# Altium PCB Pcb Layout with lora.PcbDoc
Units mm, origin at the board's own origin, x right, y up, seen from the top; angles counter-clockwise.
Board outline 47.4 x 68.9 mm, 2 copper layers (Top Layer, Bottom Layer); 15 components, 18 nets, 89 pads, 0 vias.
Unrouted connection lines stored in the file: 3.
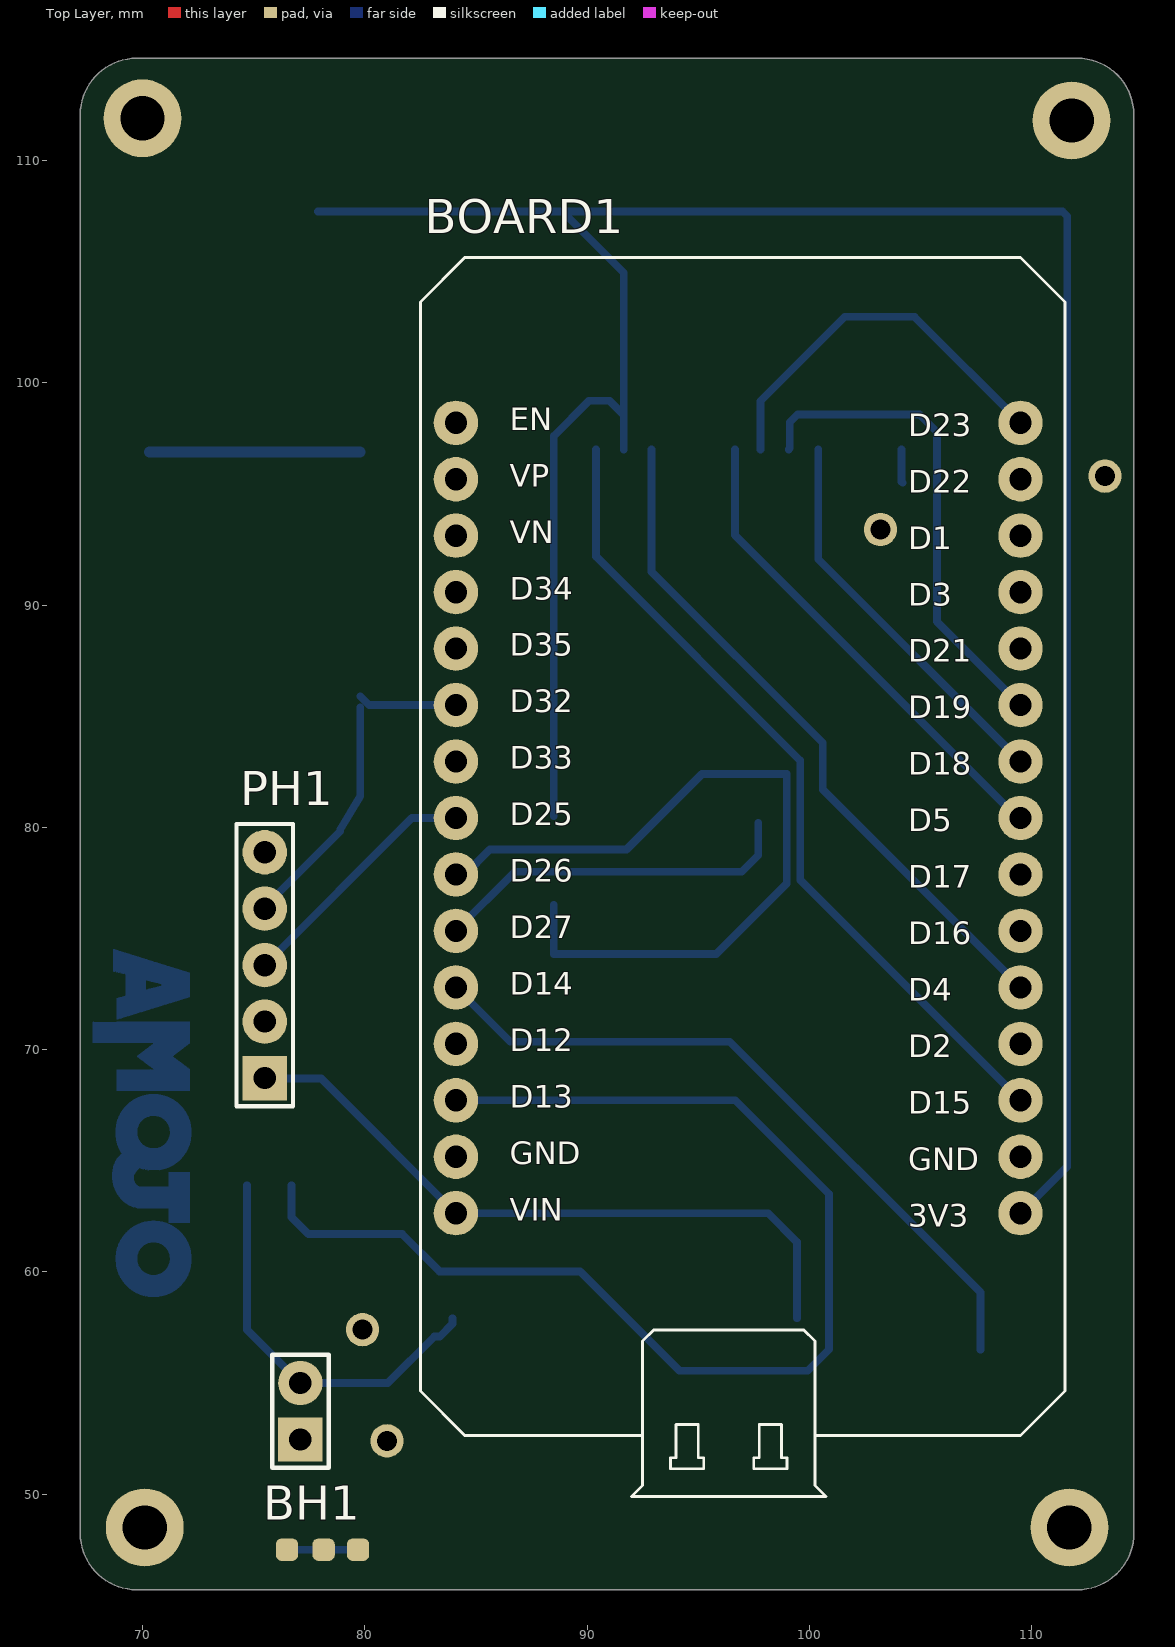
[diagram p0: Top Layer view]
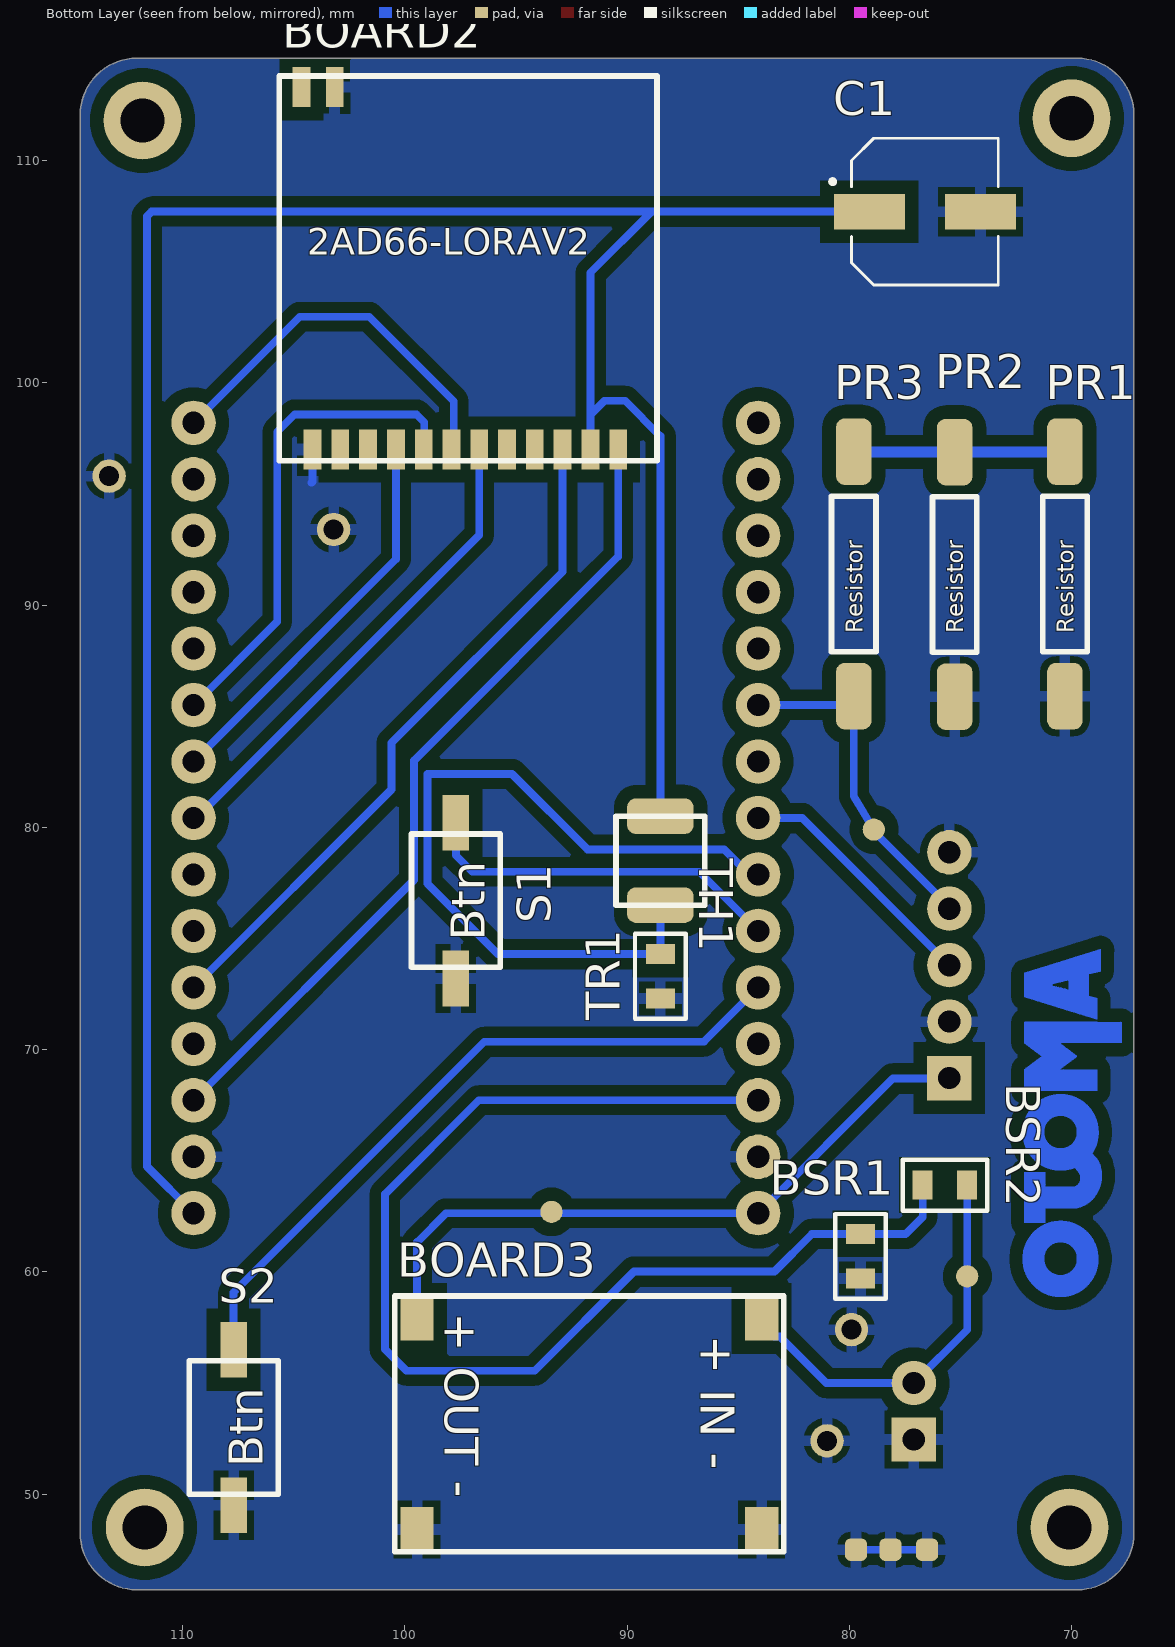
[diagram p1: Bottom Layer view, seen from below]

## Layer stack, top to bottom
Top Solder: solder mask 0.0102, Solder Resist, Dk 3.5
Top Layer: signal copper 0.0356
Dielectric 1: dielectric 0.32, FR-4, Dk 4.8
Bottom Layer: signal copper 0.0356
Bottom Solder: solder mask 0.0102, Solder Resist, Dk 3.5

## Board outline
112.06,114.6 cw(c112.06,112.06) 114.6,112.06 114.6,48.244 cw(c112.06,48.24) 112.06,45.7 69.74,45.7 cw(c69.74,48.24) 67.2,48.24 67.2,112.06 cw(c69.74,112.06) 69.74,114.6

## Design rules (kind name [scope] priority, off if disabled: settings)
Clearance [All] p1: gap=0.6 ignorepadtopadclearanceinfootprint=FALSE except(0: Arc-Hole Track-Hole SMDPad-Hole THPad-Hole Via-Hole Fill-Hole Poly-Hole Region-Hole Text-Hole; 0.254: Arc-Arc Arc-Track Track-Track SMDPad-SMDPad THPad-THPad THPad-Text; 0.3: Arc-Text Track-Text SMDPad-Text Via-Text Fill-Text Poly-Text Region-Text Text-Text; 0.4: Arc-Via Track-Via SMDPad-Via THPad-Via Via-Via; 0.5: Arc-SMDPad Arc-THPad Arc-Fill Arc-Poly Arc-Region Track-SMDPad Track-THPad Track-Fill Track-Poly Track-Region SMDPad-THPad)
PlaneClearance [All] p1: clearance=1.2
PlaneConnect [All] p1: planeconnectstyle=Relief reliefexpansion=0.508 reliefentries=4 reliefconductorwidth=0.5 reliefairgap=0.254
PolygonConnect [All] p1: connectstyle=Relief reliefconductorwidth=0.5 reliefentries=4 polygonreliefangle="90 Angle" airgapwidth=0.3
RoutingLayers [All] p1: top layer_v5=FALSE bottom layer_v5=TRUE
RoutingVias [All] p1: holewidth=0.711 width=1.27 viastyle="Through Hole" minholewidth=0.711 minwidth=1.27 maxholewidth=0.711 maxwidth=1.27
SolderMaskExpansion [All] p1: expansion=0.102 istentingtop=FALSE
Width [All] p1: maxlimit=0.5 minlimit=0.2 preferedwidth=0.35
27 further rules are at their usual default settings.

## Components (designator, comment, footprint, x,y, rotation, side; value= is the part's Value field where it differs from the comment)
BH1 "" HDR1X2 77.1,52.46 r90 top
BOARD1 "ESP32DEVKITV1" ESP32-DEVKITV1 109.5,62.64 r90 top locked
BOARD2 "Lora 2AD66-LORAV2" "LORA 2AD66-LORAV2" 104.15,97 r180 bottom
BOARD3 "Step Down Buck DC DC 3A" "STEP DOWN BUCK DC DC 3A" 99.447,57.912 r270 bottom
BSR1 "Resistor_1" "SMD RESISTOR" 79.5,60.7 r90 bottom value=30k
BSR2 "" "SMD RESISTOR" 75.7,63.9 r180 bottom value=100k
C1 "Capacitor" CAP_EEEFK1C470AL 76.6,107.7 r180 bottom value=1p
PH1 "Panel+Servo" HDR1X5 75.5,68.72 r90 top
PR1 "" "1/4W SMD RESISTOR" 70.3,85.4 r90 bottom value=10
PR2 "" "1/4W SMD RESISTOR" 75.26,85.379 r90 bottom value=10
PR3 "" "1/4W SMD RESISTOR" 79.8,85.4 r90 bottom value=10
S1 "Push Button Normally Opened" "SMD PUSH BUTTON (EXTENDED LEGS)" 97.7,73.2 r90 bottom
S2 "Push Button Normally Opened" "SMD PUSH BUTTON (EXTENDED LEGS)" 107.7,49.5 r90 bottom
TH1 "Thermistor" "Smd Thermistor Terminal" 88.5,76.5 r90 bottom
TR1 "Resistor_3" "SMD RESISTOR" 88.5,73.3 r90 bottom value=10k

## Footprints (in the part's own frame and the unit in brackets; to place one, negate y for a bottom-side part, rotate by r counter-clockwise, add the part's x,y. Pads: shape width x height; smd on the part's side, far side on the other; paste and mask are expansions set on the pad)
"1/4W SMD RESISTOR" [mm] "Footprint to use standard THC 1/4W Resistor"
  rrect50% 3x1.6 smd: 1(0.5,0) 2(11.5,0)
  silkscreen extent 2.5,-1 9.5,1
CAP_EEEFK1C470AL [mm]
  rect 3.2x1.6 smd: 1(-2.5,0) 2(2.5,0)
  silkscreen extent -4.25,-3.3 3.3,3.3, body extent -3.65,-3.3 3.65,3.3, height 5.8
ESP32-DEVKITV1 [mm]
  round 2 hole 1: 3V3(0,0) D1(30.48,0) D2(7.62,0) D3(27.94,0) D4(10.16,0) D5(17.78,0) D12(7.62,25.4) D13(5.08,25.4) D14(10.16,25.4) D15(5.08,0) D16(12.7,0) D17(15.24,0) D18(20.32,0) D19(22.86,0) D21(25.4,0) D22(33.02,0) D23(35.56,0) D25(17.78,25.4) D26(15.24,25.4) D27(12.7,25.4) D32(22.86,25.4) D33(20.32,25.4) D34(27.94,25.4) D35(25.4,25.4) EN(35.56,25.4) GND(2.54,25.4) GND@1(2.54,0) VIN(0,25.4) VN(30.48,25.4) VP(33.02,25.4)
  silkscreen extent -12.75,-2 43,27
HDR1X2 [mm]
  rect 2x2 hole 1: 1(0,0)
  round 2 hole 1: 2(2.54,0)
  silkscreen extent -1.27,-1.27 3.81,1.27
HDR1X5 [mm]
  rect 2x2 hole 1: 1(0,0)
  round 2 hole 1: 2(2.54,0) 3(5.08,0) 4(7.62,0) 5(10.16,0)
  silkscreen extent -1.27,-1.27 11.43,1.27
"LORA 2AD66-LORAV2" [mm] "Modulo 2AD66 loraWAN fabricado por G-NiceRF"
  rect 0.8x1.8 smd: 1(0,0) 2(1.25,0) 3(2.5,0) 4(3.75,0) 5(5,0) 6(6.25,0) 7(7.5,0) 8(8.75,0) 9(10,0) 10(11.25,0) 11(12.5,0) 12(13.75,0) 13(-0.5,16.3) 14(1,16.3)
  silkscreen extent -1.5,-0.5 15.5,16.8
"SMD PUSH BUTTON (EXTENDED LEGS)" [mm] "Footprint for smd push button with extended legs"
  rect 2.5x1.2 smd: 1(0,0) 2(7,0)
  silkscreen extent 0.5,-2 6.5,2
"SMD RESISTOR" [mm]
  rect 0.9x1.3 smd: 1(-1,0) 2(1,0)
  silkscreen extent -1.91,-1.14 1.91,1.14
"Smd Thermistor Terminal" [mm]
  rrect50% 1.6x3 smd: 1(0,0) 2(4,0)
  silkscreen extent 0,-2 4,2
"STEP DOWN BUCK DC DC 3A" [mm] "Buck converter DC-DC 3A max"
  rect 2x1.5 smd: 1(0,15.5) 2(9.5,15.5) 3(0,0) 4(9.5,0)
  silkscreen extent -1,-1 10.5,16.5

## Part data
BH1: library part Battery, "Constant Voltage Source", DC Magnitude=13v, SimulationGenericComponent=True
BOARD1: "Dual core, Wi-Fi: 2.4 GHz up to 150 Mbits/s,BLE (Bluetooth Low Energy) and legacy Bluetooth, 32 bits, Up to 240 MHz", Package=Package, Availability=Unavailable, Check_prices=https://www.snapeda.com/parts/ESP32%20DEVKIT%20V1/Do%20it/view-part/5659245/?ref=eda, MF="Do it", MP="ESP32 DEVKIT V1", Price=None, SnapEDA_Link=https://www.snapeda.com/parts/ESP32%20DEVKIT%20V1/Do%20it/view-part/5659245/?ref=snap
BSR1 TR1: "Resistor", SimulationGenericComponent=True, TC1=0, TC2=0
BSR2: library part Resistor_2, "Resistor", SimulationGenericComponent=True, TC1=0, TC2=0
PH1: library part "Header 5", "Header, 5-Pin", LatestRevisionDate=17-Jul-2002, LatestRevisionNote="Re-released for DXP Platform.", Publisher="Altium Limited"
PR1 PR2 PR3: library part Resistor, "Resistor", SimulationGenericComponent=True, TC1=0, TC2=0
S1 S2: library part "Push Button NO", closed=0, Rclosed=1m, Ropen=1Meg, SimulationGenericComponent=True
C1: SimulationGenericComponent=True

## Free pads (board coordinates)
  round 1.5 hole 0.9: 4(79.9,57.4) 5(81,52.4) 16(103.2,93.4) 17(113.3,95.8)
  round 1 smd far side: 6(93.4,62.7) 7(78.9,79.9) 8(74.7,59.8)
  rrect50% 1x1 all layers, no hole: 9(76.5,47.5) 10(78.15,47.5) 11(79.7,47.5)
  round 3.5 hole 2: 12(111.7,48.5) 13(111.8,111.8) 14(70,111.9) 15(70.1,48.5)

## Nets (pads, with @x,y where several pads share a name; then routed paths per layer and width w, separated by ;. In a path a pad name is that pad's centre, name@x,y a point inside that pad or via, vN(x,y) a via of type N, cw(c..) or ccw(c..) an arc to the next point about the centre after c; other vN are vias at no path point)
3v3: BOARD1.3V3 BOARD2.11 C1.1 TH1.2 | length 112.5
  Bottom Layer w0.35: C1.1@77.9,107.7 88.9,107.7 ; TH1.2 88.5,97.6 90.087,99.187 91.013,99.187 91.65,98.55 ; BOARD2.11 91.65,98.55 ; BOARD1.3V3 111.6,64.74 111.6,107.495 111.395,107.7 88.9,107.7 ; 88.9,107.7 91.65,104.95 91.65,98.55
5v: BOARD1.VIN BOARD3.3 pad.6 PH1.1 | length 30.4
  Bottom Layer w0.35: PH1.1@75.5,68.7 78.04,68.7 BOARD1.VIN 98.148,62.64 99.447,61.341 BOARD3.3
GND: BH1.1 BOARD1.GND BOARD1.GND@1 BOARD2.1 BOARD2.14 BOARD3.2 BOARD3.4 BSR1.1 C1.2 pad.4 pad.5 pad.9 pad.10 pad.11 pad.16 pad.17 PH1.2 PH1.5 PR1.1 PR2.1 S1.1 S2.1 TR1.1 | length 4.7
  Bottom Layer w0.35: pad.9 pad.10 pad.11 ; BOARD2.1 104.15,95.55 104.2,95.5
NetBH1_2: BH1.2 BOARD3.1 BSR2.2 pad.8 | length 18.1
  Bottom Layer w0.35: BSR2.2 74.7,57.4 BH1.2 81.035,55 83.122,57.087 83.372,57.087 83.947,57.662 BOARD3.1
NetBOARD1_D4: BOARD1.D4 BOARD2.10 | length 31.1
  Bottom Layer w0.35: BOARD2.10 92.9,91.5 100.6,83.8 100.6,81.7 BOARD1.D4
NetBOARD1_D5: BOARD1.D5 BOARD2.7 | length 22
  Bottom Layer w0.35: BOARD2.7 96.65,93.15 109.38,80.42 BOARD1.D5
NetBOARD1_D13: BOARD1.D13 BSR1.2 BSR2.1 | length 54.4
  Bottom Layer w0.35: BSR2.1 76.7,62.47 77.47,61.7 BSR1.2 81.686,61.7 83.366,60.02 89.687,60.02 94.158,55.55 99.924,55.55 100.889,56.515 100.889,63.5 96.669,67.72 BOARD1.D13
NetBOARD1_D14: BOARD1.D14 S2.2 | length 31.9
  Bottom Layer w0.35: BOARD1.D14 86.542,70.358 96.418,70.358 107.7,59.076 S2.2
NetBOARD1_D15: BOARD1.D15 BOARD2.12 | length 37.2
  Bottom Layer w0.35: BOARD2.12 90.4,92.189 99.588,83.002 99.588,77.632 BOARD1.D15
NetBOARD1_D18: BOARD1.D18 BOARD2.4 | length 17.8
  Bottom Layer w0.35: BOARD2.4 100.4,92.06 BOARD1.D18
NetBOARD1_D19: BOARD1.D19 BOARD2.5 | length 22.2
  Bottom Layer w0.35: BOARD2.5@99.07,97 99.12,97.05 99.12,98.22 99.477,98.577 104.953,98.577 105.74,97.79 105.74,89.26 BOARD1.D19
NetBOARD1_D23: BOARD1.D23 BOARD2.6 | length 17.4
  Bottom Layer w0.35: BOARD2.6@97.8,97 97.8,99.172 101.6,102.972 104.728,102.972 BOARD1.D23
NetBOARD1_D25: BOARD1.D25 PH1.3 | length 11.3
  Bottom Layer w0.35: PH1.3 82.12,80.42 BOARD1.D25
NetBOARD1_D26: BOARD1.D26 TH1.1 TR1.2 | length 35.7
  Bottom Layer w0.35: BOARD1.D26 84.51,77.88 85.63,79 91.776,79 95.174,82.398 98.984,82.398 98.984,77.47 95.814,74.3 TR1.2 TH1.1
NetBOARD1_D27: BOARD1.D27 S1.2 | length 16.5
  Bottom Layer w0.35: BOARD1.D27 86.76,78 96.96,78 97.7,78.74 S1.2
NetBOARD1_D32: BOARD1.D32 pad.7 PH1.4 PR3.1 | length 15.2
  Bottom Layer w0.35: PH1.4 75.5,76.42 78.9,79.82 pad.7 79.8,81.4 PR3.1@79.8,85.4 ; PR3.1 80.2,85.5 BOARD1.D32
NetBOARD2_13: BOARD2.13
NetPR1_2: PR1.2 PR2.2 PR3.2 | length 9.5
  Bottom Layer w0.35: PR1.2 PR1.2@70.31,96.889 ; PR2.2@75.249,96.889 PR2.2 PR2.2@75.27,96.889 ; PR3.2@79.79,96.889 PR3.2
  Bottom Layer w0.5: PR1.2@70.31,96.889 PR2.2@75.249,96.889 ; PR2.2@75.27,96.889 PR3.2@79.79,96.889
pads on no net: BOARD1.D1 BOARD1.D2 BOARD1.D3 BOARD1.D12 BOARD1.D16 BOARD1.D17 BOARD1.D21 BOARD1.D22 BOARD1.D33 BOARD1.D34 BOARD1.D35 BOARD1.EN BOARD1.VN BOARD1.VP BOARD2.2 BOARD2.3 BOARD2.8 BOARD2.9

## Polygon pours and split planes (outlines as drawn)
GND on Bottom Layer "GND_L02_P000" (solid, pour order 0): 112.06,114.6 cw(c112.06,112.06) 114.6,112.06 114.6,48.24 cw(c112.06,48.24) 112.06,45.7 69.74,45.7 cw(c69.74,48.24) 67.2,48.24 67.2,112.06 cw(c69.74,112.06) 69.74,114.6

## Other copper
Bottom Layer:
  region: 946 vertices and 1 holes, not listed, extent 68.679,71.365 72.136,74.523
  region: 1935 vertices and 1 holes, not listed, extent 68.643,62.205 72.202,67.986
  region: 1466 vertices and 1 holes, not listed, extent 68.792,58.877 72.202,62.292
  region: 931 vertices and 0 holes, not listed, extent 67.754,68.145 72.136,71.257

## Text inside footprints (layer, text, board x,y; h text height)
BOARD1: Top Overlay "EN" at 86.53,97.87 h1.02; Top Overlay "VP" at 86.53,95.33 h1.02; Top Overlay "VN" at 86.53,92.79 h1.02; Top Overlay "D34" at 86.53,90.25 h1.02; Top Overlay "D35" at 86.53,87.71 h1.02; Top Overlay "D32" at 86.53,85.17 h1.02; Top Overlay "D33" at 86.53,82.63 h1.02; Top Overlay "D25" at 86.53,80.09 h1.02; Top Overlay "D26" at 86.53,77.55 h1.02; Top Overlay "D27" at 86.53,75.01 h1.02; Top Overlay "D14" at 86.53,72.47 h1.02; Top Overlay "D12" at 86.53,69.93 h1.02; Top Overlay "D13" at 86.53,67.39 h1.02; Top Overlay "GND" at 86.53,64.85 h1.02; Top Overlay "VIN" at 86.53,62.31 h1.02; Top Overlay "D23" at 104.46,97.6 h1.02; Top Overlay "D22" at 104.46,95.06 h1.02; Top Overlay "D1" at 104.46,92.52 h1.02; Top Overlay "D3" at 104.46,89.98 h1.02; Top Overlay "D21" at 104.46,87.44 h1.02; Top Overlay "D19" at 104.46,84.9 h1.02; Top Overlay "D18" at 104.46,82.36 h1.02; Top Overlay "D5" at 104.46,79.82 h1.02; Top Overlay "D17" at 104.46,77.28 h1.02; Top Overlay "D16" at 104.46,74.74 h1.02; Top Overlay "D4" at 104.46,72.2 h1.02; Top Overlay "D2" at 104.46,69.66 h1.02; Top Overlay "D15" at 104.46,67.12 h1.02; Top Overlay "GND" at 104.46,64.58 h1.02; Top Overlay "3V3" at 104.46,62.04 h1.02; Mechanical 13 "ESP32-DEVKITV1" at 114.04,89 h1.27 r90
BOARD2: Bottom Overlay "2AD66-LORAV2" at 104.396,105.754 h1.2
BOARD3: Bottom Overlay "+ OUT -" at 98.193,58.158 h1.52 r90; Bottom Overlay "+ IN -" at 86.693,57.158 h1.52 r90
PR1: Bottom Overlay "Resistor" at 69.907,88.743 h0.75 r270
PR2: Bottom Overlay "Resistor" at 74.867,88.722 h0.75 r270
PR3: Bottom Overlay "Resistor" at 79.407,88.743 h0.75 r270
S1: Bottom Overlay "Btn" at 96.4,74.9 h1.52 r270
S2: Bottom Overlay "Btn" at 106.4,51.2 h1.52 r270